# EAGLE board PCB (EAGLE 9.7.0)
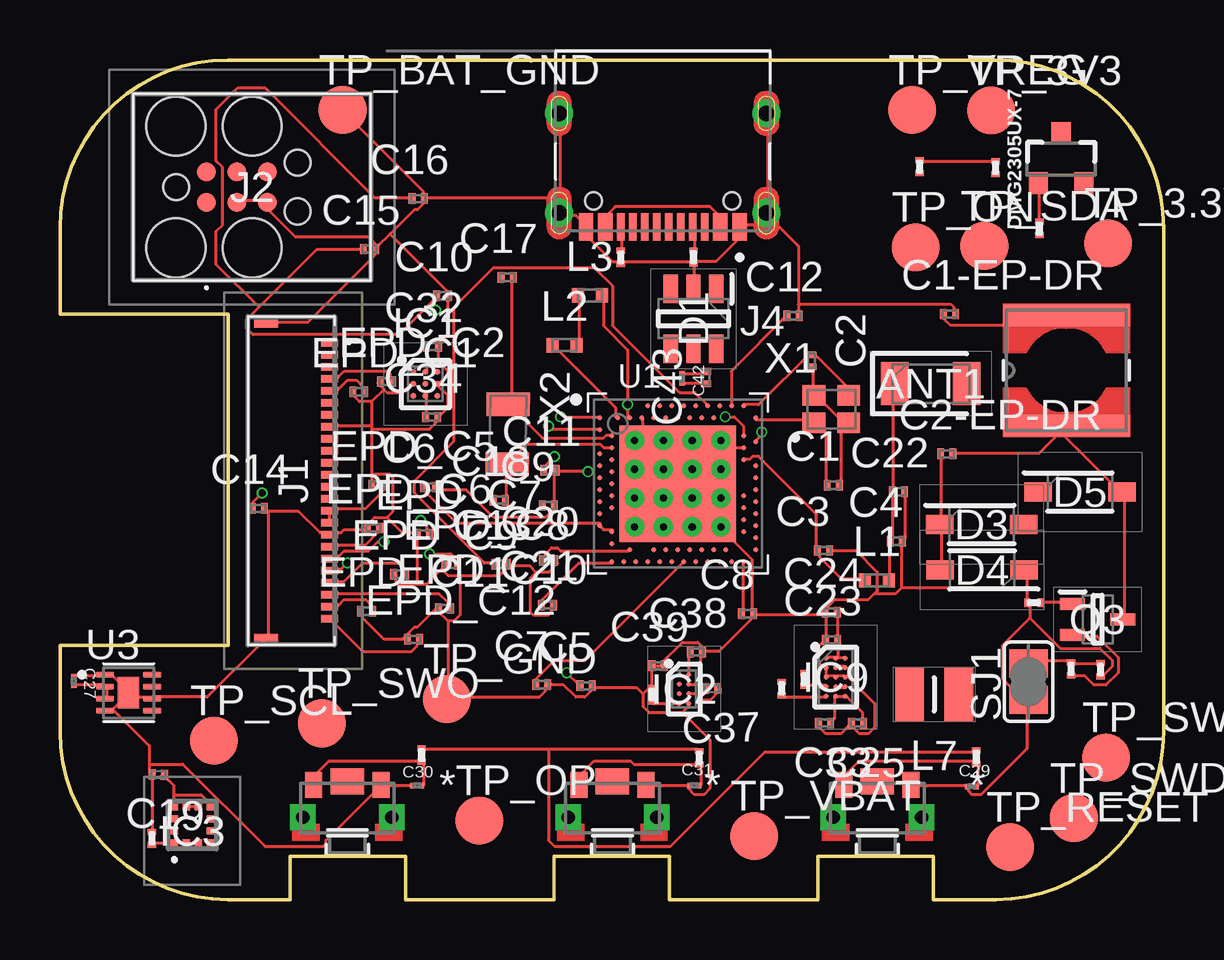
[diagram p0: board, top side]
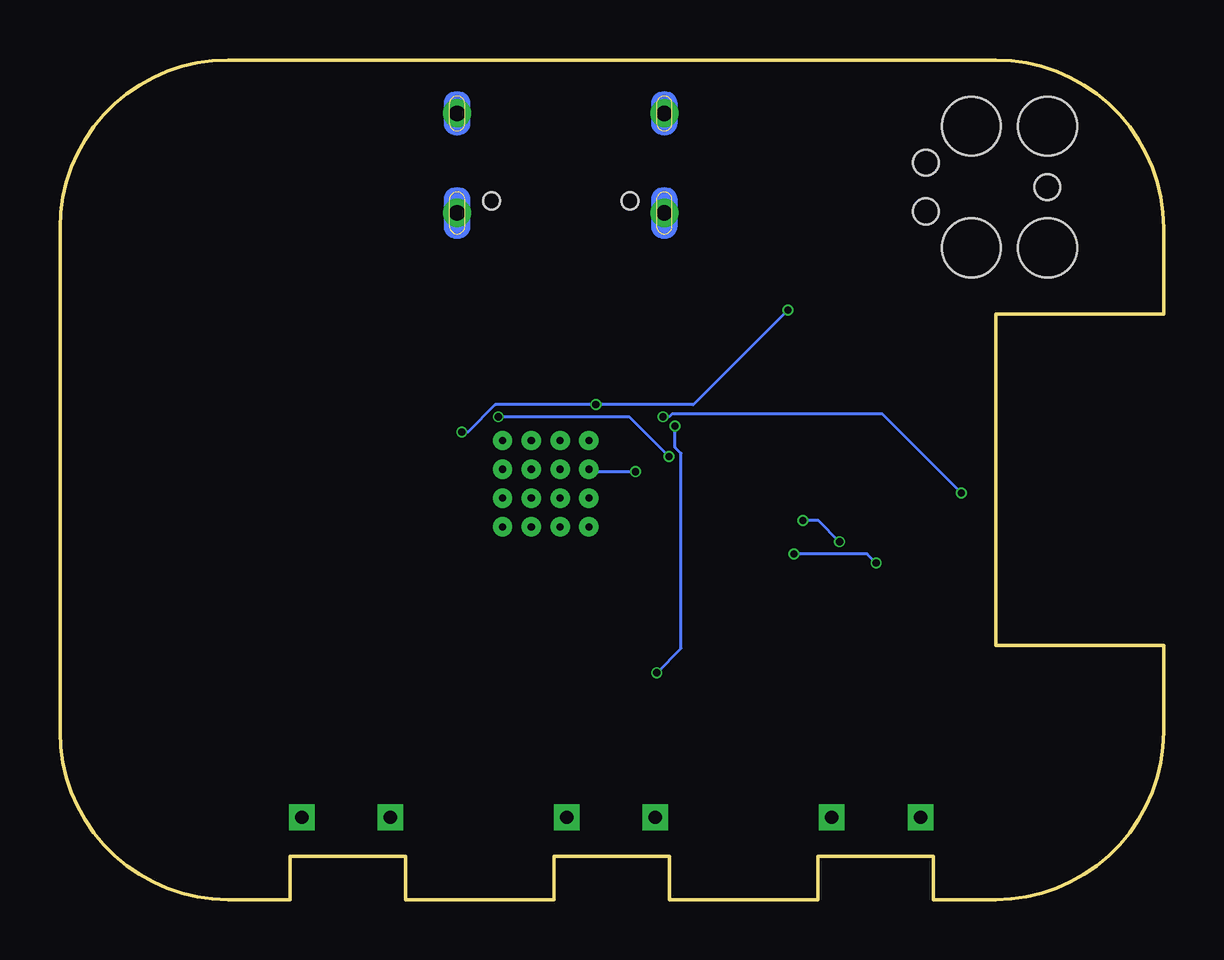
[diagram p1: board, bottom side, seen from below]

Size 46 x 35 mm. Coordinates in mm from the lower left corner, seen from the top.
Outline: 39,0 36.4,0 36.4,1.8 31.6,1.8 31.6,0 25.4,0 25.4,1.8 20.6,1.8 20.6,0 14.4,0 14.4,1.8 9.6,1.8 9.6,0 7,0 arc-90 0,7 0,10.6 7,10.6 7,24.4 0,24.4 0,28 arc-90 7,35 39,35 arc-90 46,28 46,7 arc-90 39,0
Copper layers (1*16): Top 0.035mm / dielectric 1.6mm / Bottom 0.035mm
Design rules "jlcpcb-2layers.dru": minimum track width 5mil, minimum drill 0.3mm, track to track 5mil, track to pad 5mil, pad to pad 5mil, via to via 5mil, smd to smd 5mil, copper to edge 0.2mm, drill to drill 6mil, minimum pad ring 10mil, minimum via ring 3mil, stop-mask expansion 4mil, vias tented up to drill 0mil, thermal gap 10mil

## Footprints (pad centres in the part's own frame; a part is rotated, then mirrored left to right if it is on the bottom)
2450AT18B100E_ANTC3216X140N = smd 1.15 x 1.8: 1 -1.5,0; 2 1.5,0
NORDIC_NRF_3_RESC0201_L = smd 0.28 x 0.43: 1 -0.255,0; 2 0.255,0
GRM011R60J152KE01L_2_CAPC0201X13N = smd 0.22 x 0.23: 1 -0.185,0; 2 0.185,0
ESP32_C6_LIBRARY_3_SOT95P280X145-6N = smd 1.2 x 0.6: 1 -1.25,0.95; 2 -1.25,0; 3 -1.25,-0.95; 4 1.25,-0.95; 5 1.25,0; 6 1.25,0.95
ESP32_C6_LIBRARY_5_SOD3716X135N = smd 1.15 x 0.8: 1 -1.75,0; 2 1.75,0
ESP32_C6_LIBRARY_4_ESP32_C6_LIBRARY_4_ESP32_C6_LIBRARY_4_ESP32_C6_LIBRARY_4_ESP32_WROVER_SPARKFUN-DISCRETESEMI_SOT23-3 = smd 0.8 x 0.9: 1 -0.95,-1; 2 0.95,-1; 3 0,1.1
DRV2605YZFR_BGA9C50P3X3_144X144X62 = smd 0.25 x 0.25: A1 -0.5,0.5; A2 0,0.5; A3 0.5,0.5; B1 -0.5,0; B2 0,0; B3 0.5,0; C1 -0.5,-0.5; C2 0,-0.5; C3 0.5,-0.5
BQ25180YBGR_BGA8C40P2X4_100X155X50 = smd 0.2 x 0.2: A1 -0.2,0.6; A2 0.2,0.6; B1 -0.2,0.2; B2 0.2,0.2; C1 -0.2,-0.2; C2 0.2,-0.2; D1 -0.2,-0.6; D2 0.2,-0.6
BMA423_BMA423 = smd 0.3 x 0.35: 1 -0.75,-0.775; 2 -0.25,-0.775; 3 0.25,-0.775; 4 0.75,-0.775; 7 0.75,0.775; 8 0.25,0.775; 9 -0.25,0.775; 10 -0.75,0.775 | smd 0.35 x 0.3: 5 0.775,-0.25; 6 0.775,0.25; 11 -0.775,0.25; 12 -0.775,-0.25
RT6160AWSC_BGA15C40P3X5_140X230X60 = smd 0.216 x 0.216: A1 -0.4,0.8; A2 0,0.8; A3 0.4,0.8; B1 -0.4,0.4; B2 0,0.4; B3 0.4,0.4; C1 -0.4,0; C2 0,0; C3 0.4,0; D1 -0.4,-0.4; D2 0,-0.4; D3 0.4,-0.4; E1 -0.4,-0.8; E2 0,-0.8; E3 0.4,-0.8
503480-2400_5034802400 = smd 0.3 x 0.7: 1 -5.75,1.525; 2 -5.25,1.525; 3 -4.75,1.525; 4 -4.25,1.525; 5 -3.75,1.525; 6 -3.25,1.525; 7 -2.75,1.525; 8 -2.25,1.525; 9 -1.75,1.525; 10 -1.25,1.525; 11 -0.75,1.525; 12 -0.25,1.525; 13 0.25,1.525; 14 0.75,1.525; 15 1.25,1.525; 16 1.75,1.525; 17 2.25,1.525; 18 2.75,1.525; 19 3.25,1.525; 20 3.75,1.525; 21 4.25,1.525; 22 4.75,1.525; 23 5.25,1.525; 24 5.75,1.525 | smd 0.3 x 1: MP1 -6.54,-1.125; MP2 6.54,-1.125
TC2030-IDC_TC2030IDC = smd 0.783 x 0.783: 1 -0.953,-0.635; 2 -0.953,0.635; 3 0.317,-0.635; 4 0.317,0.635; 5 1.588,-0.635; 6 1.588,0.635 | hole 2.451: -2.223,-2.54; -2.223,2.54; 0.952,-2.54; 0.952,2.54 | hole 1.067: -2.223,0; 2.857,-1.016; 2.857,1.016
KH-TYPE-C-16P_KINGHELM_KH-TYPE-C-16P = smd 0.6 x 1.15: A1_B12 -3.2,4.725; A4_B9 -2.4,4.725; A9_B4 2.4,4.725; A12_B1 3.2,4.725 | smd 0.3 x 1.15: A5 -1.25,4.725; A6 -0.25,4.725; A7 0.25,4.725; A8 1.25,4.725; B5 1.75,4.725; B6 0.75,4.725; B7 -0.75,4.725; B8 -1.75,4.725 | drill 0.65 pad 1.05: SH1 -4.32,0; SH2 4.32,0; SH3 -4.32,4.15; SH4 4.32,4.15 | hole 0.7: -2.89,3.65; 2.89,3.65
NORDIC_NRF_2_RESC0402_L = smd 0.5 x 0.6: 1 -0.5,0; 2 0.5,0
ESP32_C6_LIBRARY_2_IND_4828-WE-TPC_WRE = smd 0.9 x 5.3: 1 -2.286,0; 2 2.286,0
MLP2016SR47MT0S1_INDC2016X100N = smd 1.2 x 2.2: 1 -1.028,0; 2 1.028,0
ESP32_C6_LIBRARY_6_SOT65P210X110-3N = smd 1.05 x 0.5: 1 -1.05,0.65; 2 -1.05,-0.65; 3 1.05,0
ERA-1AEB3401C_0201 = smd 0.35 x 0.25: 1 0,0.275; 2 0,-0.275
ESP32_C6_LIBRARY_7_JUMPER_SJ = smd 1.168 x 1.6: 1 -0.762,0; 2 0.762,0
2025-10-22_07-23-44_LIBRARY_SW_EVP-AKE31A_PAN = smd 0.711 x 1.092: 1 -1.4,-0.972; 2 1.4,-0.972 | drill 0.559 pad 0.914 square: 3 -1.848,0.381; 4 1.848,0.381 | smd 1.397 x 1.092: 5 0,-1.124
HECTOR_WATCH_1_TP20R = smd 2 x 2: TP 0,0
NORDIC_NRF_4_AQFN50P700X700X85_HS-74N = smd 4.85 x 4.85: P$74 0,0 | drill 0.3 pad 0.6: P$75 -1.8,1.8; P$76 -0.6,1.8; P$77 0.6,1.8; P$78 1.8,1.8; P$79 -1.8,0.6; P$80 -0.6,0.6; P$81 0.6,0.6; P$82 1.8,0.6; P$83 -1.8,-0.6; P$84 -0.6,-0.6; P$85 0.6,-0.6; P$86 1.8,-0.6; P$87 -1.8,-1.8; P$88 -0.6,-1.8; P$89 0.6,-1.8; P$90 1.8,-1.8 | smd 0.2 x 0.2: P$A8 -1.25,3.25; P$A10 -0.75,3.25; P$A12 -0.25,3.25; P$A14 0.25,3.25; P$A16 0.75,3.25; P$A18 1.25,3.25; P$A20 1.75,3.25; P$A22 2.25,3.25; P$A23 2.75,3.25; P$AA24 3.25,-2.25; P$AB2 -2.75,-2.5; P$AC5 -2,-2.75; P$AC9 -1,-2.75; P$AC11 -0.5,-2.75; P$AC13 0,-2.75; P$AC15 0.5,-2.75; P$AC17 1,-2.75; P$AC19 1.5,-2.75; P$AC21 2,-2.75; P$AC24 3.25,-2.75; P$AD2 -2.75,-3.25; P$AD4 -2.25,-3.25; P$AD6 -1.75,-3.25; P$AD8 -1.25,-3.25; P$AD10 -0.75,-3.25; P$AD12 -0.25,-3.25; P$AD14 0.25,-3.25; P$AD16 0.75,-3.25; P$AD18 1.25,-3.25; P$AD20 1.75,-3.25; P$AD22 2.25,-3.25; P$AD23 2.75,-3.25; P$B1 -3.25,2.75; P$B3 -2.5,2.75; P$B5 -2,2.75; P$B7 -1.5,2.75; P$B9 -1,2.75; P$B11 -0.5,2.75; P$B13 0,2.75; P$B15 0.5,2.75; P$B17 1,2.75; P$B19 1.5,2.75; P$B24 3.25,2.75; P$C1 -3.25,2.25; P$D2 -2.75,2; P$D23 2.75,2; P$E24 3.25,1.75; P$F2 -2.75,1.5; P$F23 2.75,1.5; P$G1 -3.25,1.25; P$H2 -2.75,1; P$H23 2.75,1; P$J1 -3.25,0.75; P$J24 3.25,0.75; P$K2 -2.75,0.5; P$L1 -3.25,0.25; P$L24 3.25,0.25; P$M2 -2.75,0; P$N1 -3.25,-0.25; P$N24 3.25,-0.25; P$P2 -2.75,-0.5; P$P23 2.75,-0.5; P$R1 -3.25,-0.75; P$R24 3.25,-0.75; P$T2 -2.75,-1; P$T23 2.75,-1; P$U1 -3.25,-1.25; P$U24 3.25,-1.25; P$V23 2.75,-1.5; P$W1 -3.25,-1.75; P$W24 3.25,-1.75; P$Y2 -2.75,-2; P$Y23 2.75,-2
ESP32_C6_LIBRARY_SON50P200X200X80-9N = smd 0.76 x 0.27: 1 -0.985,0.75; 2 -0.985,0.25; 3 -0.985,-0.25; 4 -0.985,-0.75; 5 0.985,-0.75; 6 0.985,-0.25; 7 0.985,0.25; 8 0.985,0.75 | smd 0.9 x 1.3: 9 0,0
NORDIC_NRF_BT-XTAL_2016_N = smd 0.95 x 0.85: 1 -0.725,-0.575; 2 0.725,-0.575; 3 0.725,0.575; 4 -0.725,0.575
NORDIC_NRF_1_XTAL_3215_N = smd 1 x 1.8: 1 -1.25,0; 2 1.25,0

## Placement (x,y rotation side)
ANT1  2450AT18B100E_2450AT18B100E  [2450AT18B100E_ANTC3216X140N]  36.3,21.51 0 top
C1  12pF  [NORDIC_NRF_3_RESC0201_L]  32.23,17.27 0 top
C1-EP-DR  10µF  [NORDIC_NRF_3_RESC0201_L]  37.08,24.41 0 top
C2  12pF  [NORDIC_NRF_3_RESC0201_L]  31.32,22.46 270 top
C2-EP-DR  4.7µF/25V  [NORDIC_NRF_3_RESC0201_L]  36.96,18.58 0 top
C3  1pF  [NORDIC_NRF_3_RESC0201_L]  31.83,14.55 0 top
C4  1pF  [NORDIC_NRF_3_RESC0201_L]  34.86,14.94 0 top
C5  100nF  [NORDIC_NRF_3_RESC0201_L]  21.93,8.91 0 top
C6  4.7µF  [NORDIC_NRF_3_RESC0201_L]  15.4,17.2 0 top
C7  100nF  [NORDIC_NRF_3_RESC0201_L]  20.08,8.96 0 top
C8  100nF  [NORDIC_NRF_3_RESC0201_L]  28.67,11.92 0 top
C9  820pF  [NORDIC_NRF_3_RESC0201_L]  20.35,16.43 0 top
C10  N.C.  [NORDIC_NRF_3_RESC0201_L]  15.95,25.17 0 top
C11  100pF  [NORDIC_NRF_3_RESC0201_L]  20.43,17.89 0 top
C12  100nF  [NORDIC_NRF_3_RESC0201_L]  30.56,24.33 0 top
C13  N.C.  [NORDIC_NRF_3_RESC0201_L]  18.38,13.98 0 top
C14  4.7µF  [NORDIC_NRF_3_RESC0201_L]  8.27,16.31 0 top
C15  N.C.  [NORDIC_NRF_3_RESC0201_L]  12.91,27.12 0 top
C16  27nF  [NORDIC_NRF_3_RESC0201_L]  14.94,29.22 0 top
C17  12pF  [NORDIC_NRF_3_RESC0201_L]  18.64,25.94 0 top
C18  12pF  [NORDIC_NRF_3_RESC0201_L]  18.31,16.65 0 top
C19  100nF  [NORDIC_NRF_3_RESC0201_L]  4.1,5.21 177.5 top
C20  4.7µF  [NORDIC_NRF_3_RESC0201_L]  20.37,14.13 0 top
C21  4.7µF  [NORDIC_NRF_3_RESC0201_L]  20.32,12.28 0 top
C22  N.C.  [NORDIC_NRF_3_RESC0201_L]  34.95,17 0 top
C23  0.1uF  [NORDIC_NRF_3_RESC0201_L]  32.16,10.82 0 top
C24  10uF  [NORDIC_NRF_3_RESC0201_L]  32.15,11.98 0 top
C25  22uF  [NORDIC_NRF_3_RESC0201_L]  33.25,7.36 180 top
C27  GRM011R60J152KE01L_2_GRM011R60J152KE01L  [GRM011R60J152KE01L_2_CAPC0201X13N]  0.58,9.11 270.7 top
C29  GRM011R60J152KE01L_2_GRM011R60J152KE01L  [GRM011R60J152KE01L_2_CAPC0201X13N]  38.01,4.72 0 top
C30  GRM011R60J152KE01L_2_GRM011R60J152KE01L  [GRM011R60J152KE01L_2_CAPC0201X13N]  14.89,4.76 0 top
C31  GRM011R60J152KE01L_2_GRM011R60J152KE01L  [GRM011R60J152KE01L_2_CAPC0201X13N]  26.44,4.76 0 top
C32  1µF  [NORDIC_NRF_3_RESC0201_L]  15.53,23.05 0 top
C33  22uF  [NORDIC_NRF_3_RESC0201_L]  31.87,7.36 180 top
C34  0.1µF  [NORDIC_NRF_3_RESC0201_L]  15.5,20.11 0 top
C37  [NORDIC_NRF_3_RESC0201_L]  27.16,8.8 181.9 top
C38  [NORDIC_NRF_3_RESC0201_L]  26.53,10.32 0 top
C39  [NORDIC_NRF_3_RESC0201_L]  24.93,9.74 0 top
C42  GRM011R60J152KE01L_2_GRM011R60J152KE01L  [GRM011R60J152KE01L_2_CAPC0201X13N]  25.93,21.73 270 top
C43  4.7uF  [NORDIC_NRF_3_RESC0201_L]  26.93,21.75 90 top
D1  ESP32_C6_LIBRARY_3_USBLC6-2SC6Y  [ESP32_C6_LIBRARY_3_SOT95P280X145-6N]  26.41,24.21 270 top
D3  ESP32_C6_LIBRARY_5_MBR0530  [ESP32_C6_LIBRARY_5_SOD3716X135N]  38.42,15.64 0 top
D4  ESP32_C6_LIBRARY_5_MBR0530  [ESP32_C6_LIBRARY_5_SOD3716X135N]  38.44,13.74 180 top
D5  ESP32_C6_LIBRARY_5_MBR0530  [ESP32_C6_LIBRARY_5_SOD3716X135N]  42.52,16.99 0 top
DMG2305UX-7  20V/4.2A/52mΩ/1.4W  [ESP32_C6_LIBRARY_4_ESP32_C6_LIBRARY_4_ESP32_C6_LIBRARY_4_ESP32_C6_LIBRARY_4_ESP32_WROVER_SPARKFUN-DISCRETESEMI_SOT23-3]  41.73,30.86 0 top
EPD_C1  1uF/50V  [NORDIC_NRF_3_RESC0201_L]  12.46,21.17 0 top
EPD_C2  1uF/50V  [NORDIC_NRF_3_RESC0201_L]  13.62,21.59 0 top
EPD_C5  0.1uF/50V  [NORDIC_NRF_3_RESC0201_L]  13.25,17.28 0 top
EPD_C6  0.1uF/50V  [NORDIC_NRF_3_RESC0201_L]  13.07,15.49 0 top
EPD_C7  0.1uF/50V  [NORDIC_NRF_3_RESC0201_L]  15.15,15.23 0 top
EPD_C8  0.1uF/50V  [NORDIC_NRF_3_RESC0201_L]  16.3,13.98 0 top
EPD_C9  0.1uF/50V  [NORDIC_NRF_3_RESC0201_L]  14.16,13.57 0 top
EPD_C10  0.1uF/50V  [NORDIC_NRF_3_RESC0201_L]  16.04,12.14 0 top
EPD_C11  0.1uF/50V  [NORDIC_NRF_3_RESC0201_L]  12.77,12.02 0 top
EPD_C12  0.1uF/50V  [NORDIC_NRF_3_RESC0201_L]  14.73,10.85 0 top
IC1  DRV2605YZFR_DRV2605YZFR  [DRV2605YZFR_BGA9C50P3X3_144X144X62]  15.24,21.49 0 top
IC2  BQ25180YBGR_BQ25180YBGR  [BQ25180YBGR_BGA8C40P2X4_100X155X50]  26.02,8.78 0 top
IC3  BMA423_BMA423  [BMA423_BMA423]  5.52,3.11 0 top
IC9  RT6160AWSC_RT6160AWSC  [RT6160AWSC_BGA15C40P3X5_140X230X60]  32.33,9.27 0 top
J1  503480-2400_503480-2400  [503480-2400_5034802400]  9.72,17.46 270 top
J2  TC2030-IDC_TC2030-IDC  [TC2030-IDC_TC2030IDC]  7.06,29.7 0 top
J4  KH-TYPE-C-16P_KH-TYPE-C-16P  [KH-TYPE-C-16P_KINGHELM_KH-TYPE-C-16P]  25.13,32.77 180 top
L1  3.9nH  [NORDIC_NRF_2_RESC0402_L]  34.05,13.3 0 top
L2  10µH  [NORDIC_NRF_2_RESC0402_L]  21.04,23.11 0 top
L3  15nH  [NORDIC_NRF_2_RESC0402_L]  22.08,25.18 0 top
L5  68uH  [ESP32_C6_LIBRARY_2_IND_4828-WE-TPC_WRE]  41.95,22.06 90 top
L7  MLP2016SR47MT0S1_FTC252012SR47MBCA  [MLP2016SR47MT0S1_INDC2016X100N]  36.44,8.56 0 top
Q3  ESP32_C6_LIBRARY_6_SI1308EDL-T1-GE3  [ESP32_C6_LIBRARY_6_SOT65P210X110-3N]  43.25,11.68 0 top
R1_EP_DR  ERA-1AEB3401C_CPF0201D7K68C1  [ERA-1AEB3401C_0201]  42.14,9.62 0 top
R1_USB  ERA-1AEB3401C_CPF0201D7K68C1  [ERA-1AEB3401C_0201]  26.41,26.78 0 top
R2  ERA-1AEB3401C_CPF0201D7K68C1  [ERA-1AEB3401C_0201]  30.08,8.79 0 top
R2_EP_DR  ERA-1AEB3401C_CPF0201D7K68C1  [ERA-1AEB3401C_0201]  40.59,12.37 90 top
R2_USB  ERA-1AEB3401C_CPF0201D7K68C1  [ERA-1AEB3401C_0201]  23.38,26.77 0 top
R3  ERA-1AEB3401C_CPF0201D7K68C1  [ERA-1AEB3401C_0201]  3.84,2.55 0 top
R4  ERA-1AEB3401C_CPF0201D7K68C1  [ERA-1AEB3401C_0201]  31.03,9.17 0 top
R5  ERA-1AEB3401C_CPF0201D7K68C1  [ERA-1AEB3401C_0201]  15.07,6.02 180 top
R7  ERA-1AEB3401C_CPF0201D7K68C1  [ERA-1AEB3401C_0201]  38.19,5.94 180 top
R8  ERA-1AEB3401C_CPF0201D7K68C1  [ERA-1AEB3401C_0201]  26.64,5.91 179.6 top
R9  ERA-1AEB3401C_CPF0201D7K68C1  [ERA-1AEB3401C_0201]  24.67,8.54 0 top
R17  ERA-1AEB3401C_CPF0201D7K68C1  [ERA-1AEB3401C_0201]  39,30.51 0 top
R18  ERA-1AEB3401C_CPF0201D7K68C1  [ERA-1AEB3401C_0201]  35.84,30.55 0 top
R_PWR_EPD  ERA-1AEB3401C_CPF0201D7K68C1  [ERA-1AEB3401C_0201]  40.83,27.98 0 top
R_TYPE_SEL  ERA-1AEB3401C_CPF0201D7K68C1  [ERA-1AEB3401C_0201]  43.38,9.58 180 top
SJ1  [ESP32_C6_LIBRARY_7_JUMPER_SJ]  40.37,9.08 90 top
SW_DN  2025-10-22_07-23-44_LIBRARY_EVP-AKE31ASW_EVP-AKE31A_PAN  [2025-10-22_07-23-44_LIBRARY_SW_EVP-AKE31A_PAN]  34.07,3.81 180 top
SW_ENT  2025-10-22_07-23-44_LIBRARY_EVP-AKE31ASW_EVP-AKE31A_PAN  [2025-10-22_07-23-44_LIBRARY_SW_EVP-AKE31A_PAN]  23.03,3.81 180 top
SW_UP  2025-10-22_07-23-44_LIBRARY_EVP-AKE31ASW_EVP-AKE31A_PAN  [2025-10-22_07-23-44_LIBRARY_SW_EVP-AKE31A_PAN]  11.98,3.81 180 top
TP_3.3V  HECTOR_WATCH_1_TPTP20R  [HECTOR_WATCH_1_TP20R]  43.69,27.36 0 top
TP_3V3  HECTOR_WATCH_1_TPTP20R  [HECTOR_WATCH_1_TP20R]  38.82,32.89 0 top
TP_BAT_GND  HECTOR_WATCH_1_TPTP20R  [HECTOR_WATCH_1_TP20R]  11.78,32.91 0 top
TP_GND  HECTOR_WATCH_1_TPTP20R  [HECTOR_WATCH_1_TP20R]  16.13,8.35 0 top
TP_ON  HECTOR_WATCH_1_TPTP20R  [HECTOR_WATCH_1_TP20R]  35.66,27.19 0 top
TP_OP  HECTOR_WATCH_1_TPTP20R  [HECTOR_WATCH_1_TP20R]  17.49,3.29 0 top
TP_RESET  HECTOR_WATCH_1_TPTP20R  [HECTOR_WATCH_1_TP20R]  39.61,2.18 0 top
TP_SCL  HECTOR_WATCH_1_TPTP20R  [HECTOR_WATCH_1_TP20R]  6.42,6.63 0 top
TP_SDA  HECTOR_WATCH_1_TPTP20R  [HECTOR_WATCH_1_TP20R]  38.53,27.24 0 top
TP_SWDCLK  HECTOR_WATCH_1_TPTP20R  [HECTOR_WATCH_1_TP20R]  43.6,5.92 0 top
TP_SWDIO  HECTOR_WATCH_1_TPTP20R  [HECTOR_WATCH_1_TP20R]  42.26,3.39 0 top
TP_SWO  HECTOR_WATCH_1_TPTP20R  [HECTOR_WATCH_1_TP20R]  10.91,7.34 0 top
TP_VBAT  HECTOR_WATCH_1_TPTP20R  [HECTOR_WATCH_1_TP20R]  28.94,2.65 0 top
TP_VREG  HECTOR_WATCH_1_TPTP20R  [HECTOR_WATCH_1_TP20R]  35.53,32.91 0 top
U1  NORDIC_NRF_4_NRF52840_QF  [NORDIC_NRF_4_AQFN50P700X700X85_HS-74N]  25.75,17.34 0 top
U3  ESP32_C6_LIBRARY_MAX17048G+T10  [ESP32_C6_LIBRARY_SON50P200X200X80-9N]  2.86,8.62 0 top
X1  [NORDIC_NRF_BT-XTAL_2016_N]  32.15,20.44 0 top
X2  32.768kHz  [NORDIC_NRF_1_XTAL_3215_N]  18.66,19.4 269 top

## Library data of the parts
ANT1 = InkTime_v5; ARROW_PART_NUMBER: 2450AT18B100E; ARROW_PRICE-STOCK: https://www.arrow.com/en/products/2450at18b100e/johanson-dielectrics?utm_currency=USD&region=nac; DESCRIPTION: Antennas 2.45GHz ANTENNA; HEIGHT: 1.4mm; MANUFACTURER_NAME: JOHANSON TECHNOLOGY; MANUFACTURER_PART_NUMBER: 2450AT18B100E; MOUSER_PART_NUMBER: 609-2450AT18B100E; MOUSER_PRICE-STOCK: https://www.mouser.co.uk/ProductDetail/Johanson-Technology/2450AT18B100E?qs=yCnrNFeXz%252Bh5MFsFIXGZGA%3D%3D
C1 C1-EP-DR C2 C2-EP-DR C3-C25 C32-C34 C37-C39 C43 EPD_C1 EPD_C2 EPD_C5-EPD_C12 L1-L3 R1_EP_DR R1_USB R2 R2_EP_DR R2_USB R3-R5 R7-R9 R17 R18 R_PWR_EPD R_TYPE_SEL SJ1 TP_3.3V TP_3V3 TP_BAT_GND TP_GND TP_ON TP_OP TP_RESET TP_SCL TP_SDA TP_SWDCLK TP_SWDIO TP_SWO TP_VBAT TP_VREG U1 X1 X2 = InkTime_v5
C27 C29-C31 C42 = InkTime_v5; AVAILABILITY: In Stock; CHECK_PRICES: https://www.snapeda.com/parts/GRM011R60J152KE01L/Murata/view-part/?ref=eda; DESCRIPTION: SMD Capacitor X5R(EIA) with Capacitance: 1500pF Tol. 10%. Rated Voltage: 6.3Vdc; MF: Murata; MP: GRM011R60J152KE01L; PACKAGE: 0201 Murata; PRICE: None; SNAPEDA_LINK: https://www.snapeda.com/parts/GRM011R60J152KE01L/Murata/view-part/?ref=snap
D1 = InkTime_v5; AVAILABILITY: In Stock; CHECK_PRICES: https://www.snapeda.com/parts/USBLC6-2SC6Y/STMicroelectronics/view-part/?ref=eda; DESCRIPTION: 17V Clamp 5A (8/20µs) Ipp Tvs Diode Surface Mount SOT-23-6; MF: STMicroelectronics; MP: USBLC6-2SC6Y; PACKAGE: SOT-23-6 STMicroelectronics; PRICE: None; SNAPEDA_LINK: https://www.snapeda.com/parts/USBLC6-2SC6Y/STMicroelectronics/view-part/?ref=snap
D3-D5 = InkTime_v5; AVAILABILITY: In Stock; CHECK_PRICES: https://www.snapeda.com/parts/MBR0530/Onsemi/view-part/?ref=eda; DESCRIPTION: Diode Schottky 30 V 500mA Surface Mount SOD-123; MF: ON Semiconductor; MP: MBR0530; PACKAGE: SOD-123-2 ON Semiconductor; PRICE: None; PURCHASE-URL: https://www.snapeda.com/api/url_track_click_mouser/?unipart_id=179458&manufacturer=ON Semiconductor&part_name=MBR0530&search_term=None; SNAPEDA_LINK: https://www.snapeda.com/parts/MBR0530/Onsemi/view-part/?ref=snap
DMG2305UX-7 = InkTime_v5; PROD_ID: TRAN-14388
IC1 = InkTime_v5; ARROW_PART_NUMBER: DRV2605YZFR; ARROW_PRICE-STOCK: https://www.arrow.com/en/products/drv2605yzfr/texas-instruments?region=nac; DESCRIPTION: Haptic Driver for ERM/LRA with Built-In Library and Smart Loop Architecture; HEIGHT: 0.625mm; MANUFACTURER_NAME: Texas Instruments; MANUFACTURER_PART_NUMBER: DRV2605YZFR
IC2 = InkTime_v5; ARROW_PART_NUMBER: BQ25180YBGR; ARROW_PRICE-STOCK: https://www.arrow.com/en/products/bq25180ybgr/texas-instruments?utm_currency=USD&region=nac; DESCRIPTION: Charger IC Lithium Ion/Polymer, Lithium Iron Phosphate 8-DSBGA (1.6x1.1); HEIGHT: 0.5mm; MANUFACTURER_NAME: Texas Instruments; MANUFACTURER_PART_NUMBER: BQ25180YBGR; MOUSER_PART_NUMBER: 595-BQ25180YBGR; MOUSER_PRICE-STOCK: https://www.mouser.co.uk/ProductDetail/Texas-Instruments/BQ25180YBGR?qs=doiCPypUmgEWjAK%252BJAX6Tw%3D%3D
IC3 = InkTime_v5; ARROW_PART_NUMBER: BMA423; ARROW_PRICE-STOCK: https://www.arrow.com/en/products/bma423/bosch; DESCRIPTION: Accelerometers Triaxial low-g 12bit Acceleration Sensor; HEIGHT: 1mm; MANUFACTURER_NAME: BOSCH; MANUFACTURER_PART_NUMBER: BMA423; MOUSER_PART_NUMBER: 262-BMA423; MOUSER_PRICE-STOCK: https://www.mouser.co.uk/ProductDetail/Bosch-Sensortec/BMA423?qs=HXFqYaX1Q2xC%252BSgeGoX3mg%3D%3D
IC9 = InkTime_v5; DESCRIPTION: Buck-Boost Regulator Positive Output Step-Up/Step-Down I2C DC-DC Controller IC 15-WL-CSP (BSC) (1.4x2.3); HEIGHT: 0.6mm; MANUFACTURER_NAME: RICHTEK; MANUFACTURER_PART_NUMBER: RT6160AWSC; MOUSER_PART_NUMBER: 835-RT6160AWSC; MOUSER_PRICE-STOCK: https://www.mouser.co.uk/ProductDetail/Richtek/RT6160AWSC?qs=amGC7iS6iy%2FLd9PSoixZXQ%3D%3D
J1 = InkTime_v5; DESCRIPTION: FFC & FPC Connectors 0.5mm FPC RA SMT Dual Contact 24Ckt; HEIGHT: 1.87mm; MANUFACTURER_NAME: Molex; MANUFACTURER_PART_NUMBER: 503480-2400; MOUSER_PART_NUMBER: 538-503480-2400; MOUSER_PRICE-STOCK: https://www.mouser.co.uk/ProductDetail/Molex/503480-2400?qs=OAhjpuo3Vu7efIoxFh9AOw%3D%3D
J2 = InkTime_v5; DESCRIPTION: CABLE ADAPTER 6 POS; HEIGHT: 19mm; MANUFACTURER_NAME: Tag Connect; MANUFACTURER_PART_NUMBER: TC2030-IDC
J4 = InkTime_v5; AVAILABILITY: Not in stock; CHECK_PRICES: https://www.snapeda.com/parts/KH-TYPE-C-16P/Kinghelm/view-part/?ref=eda; MF: kinghelm; MP: KH-TYPE-C-16P; PACKAGE: None; PRICE: None; SNAPEDA_LINK: https://www.snapeda.com/parts/KH-TYPE-C-16P/Kinghelm/view-part/?ref=snap
L5 = InkTime_v5; COPYRIGHT: Copyright (C) 2024 Ultra Librarian. All rights reserved.; MANUFACTURER_PART_NUMBER: 744043680; MFR_NAME: Wurth Electronics
L7 = InkTime_v5; DESCRIPTION: SMD / SMT Inductors (Coils), L=0.47?H, L x W x T :; HEIGHT: 1mm; JLCPCB: https://jlcpcb.com/partdetail/6763488-FTC252012SR47MBCA/C5832368; MANUFACTURER_NAME: TDK; MANUFACTURER_PART_NUMBER: FTC252012SR47MBCA
Q3 = InkTime_v5; AVAILABILITY: In Stock; CHECK_PRICES: https://www.snapeda.com/parts/SI1308EDL-T1-GE3/Vishay+Siliconix/view-part/?ref=eda; DESCRIPTION: Si1308EDL-T1-GE3 N-channel MOSFET Transistor, 1.5 A, 30 V, 3-Pin SC-70 | Siliconix / Vishay SI1308EDL-T1-GE3; MF: Vishay Siliconix; MP: SI1308EDL-T1-GE3; PACKAGE: SOT-323 Vishay Semiconductor; PRICE: None; PURCHASE-URL: https://www.snapeda.com/api/url_track_click_mouser/?unipart_id=274603&manufacturer=Vishay Siliconix&part_name=SI1308EDL-T1-GE3&search_term=None; SNAPEDA_LINK: https://www.snapeda.com/parts/SI1308EDL-T1-GE3/Vishay+Siliconix/view-part/?ref=snap
SW_DN SW_ENT SW_UP = InkTime_v5; COPYRIGHT: Copyright (C) 2025 Ultra Librarian. All rights reserved.; DIGI-KEY_PART_NUMBER_1: P123437TR-ND; DIGI-KEY_PART_NUMBER_2: P123437CT-ND; DIGI-KEY_PART_NUMBER_3: P123437DKR-ND; MANUFACTURER_NAME: Panasonic; MANUFACTURER_PART_NUMBER: EVP-AKE31A
U3 = InkTime_v5; AVAILABILITY: In Stock; CHECK_PRICES: https://www.snapeda.com/parts/MAX17048G+T10/Analog+Devices/view-part/?ref=eda; DESCRIPTION: 3µA 1-Cell/2-Cell Fuel Gauge with ModelGauge; MF: Analog Devices; MP: MAX17048G+T10; PACKAGE: TDFN-8 Maxim; PRICE: None; PURCHASE-URL: https://www.snapeda.com/api/url_track_click_mouser/?unipart_id=329239&manufacturer=Analog Devices&part_name=MAX17048G+T10&search_term=None; SNAPEDA_LINK: https://www.snapeda.com/parts/MAX17048G+T10/Analog+Devices/view-part/?ref=snap

## Nets
GND: C1-EP-DR.2 C3.2 C4.2 C5.2 C6.2 C7.2 C8.2 C9.2 C10.2 C11.2 C12.2 C13.2 C14.2 C15.2 C16.2 C19.2 C20.2 C21.2 C22.2 C23.1 C24.1 C25.2 C27.1 C29.1 C30.1 C31.1 C32.2 C33.2 C34.2 C37.2 C38.2 C39.1 C39.2 D1.2 D4.1 EPD_C1.1 EPD_C2.1 EPD_C5.1 EPD_C6.1 EPD_C7.1 EPD_C8.1 EPD_C9.1 EPD_C10.1 EPD_C11.1 EPD_C12.1 IC1.B1 IC1.B3 IC2.B2 IC2.D2 IC9.B1 IC9.C1 IC9.C2 IC9.C3 J1.8 J1.17 J1.MP1 J1.MP2 J2.3 J2.5 J4.A1_B12 J4.A12_B1 J4.SH1 J4.SH2 J4.SH3 J4.SH4 R1_USB.2 R2_EP_DR.1 R2_USB.2 R3.1 R9.1 R_TYPE_SEL.1 SJ1.1 SW_DN.1 SW_ENT.1 SW_UP.1 TP_BAT_GND.TP TP_GND.TP U1.P$74 U1.P$75 U1.P$76 U1.P$77 U1.P$78 U1.P$79 U1.P$80 U1.P$81 U1.P$82 U1.P$83 U1.P$84 U1.P$85 U1.P$86 U1.P$87 U1.P$88 U1.P$89 U1.P$90 U1.P$B7 U1.P$F23 U3.1 U3.4 U3.6 U3.9
GND1: R1_EP_DR.1 R_TYPE_SEL.2 SJ1.2
GND2: C29.2 R7.1 SW_DN.2
GND3: C31.2 R8.1 SW_ENT.2
GND4: C30.2 R5.1 SW_UP.2
N$1: IC2.D1 R9.2
N$2: IC2.A1
N$3: C38.1 IC2.A2
N$4: IC2.B1
N$5: L7.1
N$6: L7.2
N$7: C37.1 IC2.C2
N$8: C23.2 C24.2 IC9.A1 IC9.A2 IC9.A3
N$9: TP_3V3.TP
N$10: IC9.B2 IC9.B3
N$13: TP_VREG.TP
N$14: IC9.D1 R4.2
N$15: R4.1
N$16: R17.1 R18.1
N$17: R17.2
N$18: R18.2
N$19: TP_SCL.TP
N$20: TP_SDA.TP
N$21: IC9.D2 IC9.D3
N$22: C25.1 C33.1 IC9.E2 IC9.E3
N$23: IC9.E1 R2.2
N$24: R2.1
N$25: C19.1 IC3.7 IC3.10
N$26: IC3.3
N$27: IC3.2
N$28: IC3.6
N$29: IC3.5
N$30: IC3.12
N$31: IC3.8 IC3.9
N$32: IC3.1 R3.2
N$33: TP_3.3V.TP
N$34: TP_RESET.TP
N$35: TP_SWDCLK.TP
N$36: TP_SWDIO.TP
N$37: TP_SWO.TP
N$38: J2.1
N$39: J2.2
N$40: J2.4
N$41: J2.6
N$42: C7.1 U1.P$AD14
N$43: C21.1 U1.P$AD2
N$44: U1.P$AD22
N$45: U1.P$AC21
N$46: U1.P$AD20
N$47: U1.P$AC19
N$48: U1.P$AD18
N$49: U1.P$AC17
N$50: U1.P$AD16
N$51: U1.P$AC15
N$52: U1.P$AC13
N$53: U1.P$AD12
N$54: U1.P$AC11
N$55: U1.P$AD10
N$56: U1.P$AC9
N$57: U1.P$AD8
N$58: U1.P$AD6
N$59: U1.P$AD4
N$60: C8.1 U1.P$AD23
N$61: U1.P$N24
N$62: C9.1
N$63: U1.P$AA24
N$64: U1.P$AC24
N$65: U1.P$Y23
N$66: U1.P$W24
N$67: U1.P$V23
N$68: U1.P$U24
N$69: U1.P$T23
N$70: U1.P$R24
N$71: U1.P$P23
N$72: U1.P$L24
N$73: U1.P$J24
N$74: C3.1 L1.1 U1.P$H23
N$75: ANT1.1 C4.1 C22.1 L1.2
N$76: C10.1 C15.1 C16.1 L3.2 U1.P$B5 U1.P$E24
N$77: C11.1 U1.P$D23
N$78: C1.1 U1.P$B24 X1.1
N$79: C2.1 U1.P$A23 X1.3
N$80: C1.2 C2.2 X1.2 X1.4
N$81: C12.1 U1.P$A22
N$82: U1.P$A20
N$83: U1.P$B19
N$84: U1.P$B17
N$85: U1.P$A16
N$86: U1.P$B15
N$87: U1.P$A14
N$88: U1.P$B13
N$89: U1.P$A12
N$90: U1.P$B11
N$91: U1.P$A10
N$92: U1.P$B9
N$93: U1.P$A8
N$94: C13.1 U1.P$A18
N$95: L2.2 L3.1
N$96: L2.1 U1.P$B3
N$97: C20.1 U1.P$AC5
N$98: C6.1 U1.P$W1 U1.P$Y2
N$99: U1.P$U1
N$100: U1.P$T2
N$101: U1.P$R1
N$102: U1.P$P2
N$103: U1.P$N1
N$104: U1.P$M2
N$105: U1.P$L1
N$106: U1.P$K2
N$107: U1.P$J1
N$108: U1.P$H2
N$109: U1.P$G1
N$110: C14.1 U1.P$B1
N$111: C5.1 U1.P$C1
N$112: C17.2 U1.P$D2 X2.1
N$113: C17.1
N$114: C18.2 U1.P$F2 X2.2
N$115: C18.1
N$116: DMG2305UX-7.3
N$117: DMG2305UX-7.2
N$118: C1-EP-DR.1 L5.2
N$119: C2-EP-DR.2 D5.2 L5.1 Q3.3
N$120: C2-EP-DR.1 D3.1 D4.2
N$121: D3.2
N$122: D5.1
N$123: Q3.1 R2_EP_DR.2
N$124: Q3.2 R1_EP_DR.2
N$125: DMG2305UX-7.1 R_PWR_EPD.1
N$126: R_PWR_EPD.2
N$127: TP_OP.TP
N$128: TP_ON.TP
N$129: IC1.A1
N$130: IC1.A3
N$131: IC1.B2
N$132: C32.1 IC1.A2
N$133: IC1.C3
N$134: C34.1 IC1.C2
N$135: IC1.C1
N$136: R5.2 R7.2 R8.2
N$137: TP_VBAT.TP
N$138: U3.5
N$139: U3.7
N$140: U3.8
N$141: C27.2 U3.2 U3.3
N$142: J1.2
N$143: J1.3
N$144: J1.9
N$145: J1.10
N$146: J1.11
N$147: J1.12
N$148: J1.13
N$149: J1.14
N$150: EPD_C12.2 J1.24
N$151: EPD_C2.2 J1.4
N$152: EPD_C1.2 J1.5
N$153: EPD_C5.2 J1.15 J1.16
N$154: EPD_C11.2 J1.23
N$155: EPD_C10.2 J1.22
N$156: EPD_C9.2 J1.21
N$157: EPD_C8.2 J1.20
N$158: EPD_C7.2 J1.19
N$159: EPD_C6.2 J1.18
N$160: J4.B6
N$161: J4.B7
N$162: J4.A4_B9 J4.A9_B4
N$163: J4.A6
N$164: J4.A7
N$165: J4.B5 R2_USB.1
N$166: J4.A5 R1_USB.1
N$167: D1.3
N$168: D1.1
N$169: D1.6
N$170: D1.5
N$171: D1.4
N$172: C42.2 C43.1
N$173: C42.1 C43.2
SDA/2.4C: IC2.C1

## Tracks (layer width: path | path; a pad name or v marks a point on that pad's centre or on a via)
GND  (via drill 0.3)
  Top 0.127: C6.2 15.66,17.07 16.93,17.07 18.08,15.93 20.23,15.93 20.62,16.31 C9.2 20.62,17.84 C11.2 20.74,17.84 v22.01,17.84 | 24.04,19.23 24.3,19.49 24.3,20 U1.P$B7 | 27.6,19.11 27.85,18.85 28.49,18.85 U1.P$F23 | 25.06,15.55 24.04,15.55 U1.P$87 | 25.06,15.55 U1.P$88 | 25.06,15.55 U1.P$74 | 24.04,17.84 24.04,16.82 U1.P$83 | U1.P$84 25.19,16.69 25.44,16.69 U1.P$74 | 24.04,17.84 U1.P$79 | 24.04,17.84 U1.P$74 | U1.P$80 25.19,17.96 U1.P$74 | 27.47,15.55 26.46,15.55 U1.P$89 | U1.P$85 26.33,16.82 U1.P$74 | 27.47,15.55 U1.P$90 27.6,15.42 28.87,14.15 28.87,11.99 C8.2 29,11.87 | 27.47,15.55 U1.P$74 | U1.P$86 27.47,16.69 26.97,16.19 26.84,16.19 U1.P$74 | U1.P$81 26.33,17.96 U1.P$74 | U1.P$82 27.47,17.96 26.97,18.47 U1.P$74 | 24.04,19.23 U1.P$75 | 24.04,19.23 U1.P$74 | U1.P$76 25.06,19.11 24.55,18.6 U1.P$74 | U1.P$77 26.46,19.11 26.97,18.6 27.09,18.6 U1.P$74 | 27.6,19.11 U1.P$78 | 27.6,19.11 U1.P$74 | SW_DN.1 35.47,4.76 37.76,4.76 C29.1 37.89,4.63 37.89,4.5 38.01,4.37 38.4,4.37 40.3,6.28 40.3,8.31 SJ1.1 40.3,8.44 40.05,8.44 39.28,9.2 39.28,10.6 40.43,11.74 | 40.3,13.01 40.3,13.65 D4.1 | 40.3,13.01 40.3,12.38 R2_EP_DR.1 40.43,12.25 40.43,11.74 | 40.43,11.74 41.7,10.47 43.35,10.47 43.86,9.96 43.86,9.71 43.48,9.33 R_TYPE_SEL.1 | 26.2,4.76 24.55,4.76 SW_ENT.1 | 22.27,8.82 21.89,8.44 21.5,8.44 21,8.95 20.36,8.95 C7.2 20.23,8.95 20.23,8.69 19.98,8.44 16.17,8.44 | 26.71,8.95 26.2,8.95 IC2.B2 | 26.71,8.95 26.84,8.82 C37.2 | 26.71,8.95 26.71,10.22 C38.2 | 24.68,9.71 25.06,9.71 C39.2 25.06,9.84 25.95,10.72 26.58,10.72 26.71,10.6 26.71,10.34 C38.2 | 25.95,7.8 26.2,8.06 26.2,8.18 IC2.D2 | 25.95,7.8 24.55,7.8 24.3,8.06 24.3,8.57
  Top 0.127: 24.3,8.57 24.55,8.82 R9.1 24.68,9.71 | 24.68,9.71 C39.1 | 22.27,8.82 24.04,8.82 24.3,8.57 | 22.27,8.82 C5.2 | 26.2,4.76 26.2,4.63 26.46,4.37 26.84,4.37 27.09,4.63 27.09,6.66 25.95,7.8 | 26.2,4.76 C31.1 | C22.2 35.22,16.95 35.22,15.04 C4.2 35.09,14.92 35.09,13.01 | C33.2 31.66,7.3 31.66,7.17 31.92,6.91 32.55,6.91 32.93,7.3 C25.2 33.06,7.3 33.06,7.17 33.32,6.91 33.7,6.91 33.95,7.17 33.95,8.18 32.81,9.33 IC9.C3 32.68,9.33 32.43,9.33 IC9.C2 32.3,9.33 31.92,9.33 | 31.92,9.33 31.92,9.58 IC9.B1 31.92,9.71 31.79,9.71 31.54,9.96 31.54,10.47 31.79,10.72 C23.1 31.92,10.85 31.92,11.87 C24.1 | 31.92,9.33 IC9.C1 | 29,11.87 31.79,11.87 C24.1 | 33.95,12.76 33.7,12.5 32.3,12.5 31.79,11.99 C24.1 | 33.95,12.76 34.08,12.88 34.08,13.65 33.19,14.53 32.17,14.53 C3.2 | 35.09,13.01 34.84,12.76 33.95,12.76 | 29,11.87 27.47,10.34 26.84,10.34 C38.2 | 35.09,13.01 40.3,13.01 | R1_USB.2 26.46,26.47 26.46,25.58 D1.2 | R1_USB.2 26.33,26.6 23.41,26.6 R2_USB.2 23.28,26.6 23.03,26.6 22.01,27.62 22.01,28 J4.A12_B1 21.89,28.12 21.5,28.5 20.87,28.5 J4.SH4 20.87,28.63 20.87,29.27 | 20.87,29.27 20.87,32.7 J4.SH2 | 30.78,24.82 30.78,27.23 29.51,28.5 J4.SH3 | 30.78,24.82 30.78,24.44 C12.2 | 30.78,24.82 37.13,24.82 37.25,24.69 37.25,24.44 C1-EP-DR.2 | J4.SH3 29.38,28.5 29,28.12 28.36,28.12 J4.A1_B12 28.24,28 28.24,27.49 27.35,26.6 26.46,26.6 R1_USB.2 | J4.SH1 29.51,32.7 29.51,28.63 J4.SH3 | C30.1 14.65,4.76 13.5,4.76 SW_UP.1 13.38,4.76 11.09,2.47 11.09,2.34 10.96,2.22 8.55,2.22 5.12,5.64 3.72,5.64 | R3.1 3.85,2.85 3.85,5.14 C19.2 3.72,5.26 3.72,5.64 | C27.1 0.68,9.33 1.82,9.33 U3.1 1.95,9.33 2.2,9.33 2.84,8.69 U3.9
  Top 0.127: 2.2,7.93 1.95,7.93 U3.4 2.2,7.93 | 2.2,7.93 2.84,8.57 U3.9 | U3.9 2.96,8.57 3.09,8.44 3.72,8.44 U3.6 3.85,8.44 6.14,8.44 8.55,10.85 J1.MP2 8.68,10.98 8.68,16.19 | 3.72,5.64 3.72,6.41 2.2,7.93 | J2.3 7.41,29.14 8.55,29.14 J2.5 8.68,29.01 8.68,28.76 9.82,27.62 12.87,27.62 13.25,27.23 | 13.76,27.74 14.77,28.76 14.9,28.76 15.28,29.14 C16.2 | 13.76,27.74 13.25,27.23 | J1.MP1 8.68,24.06 10.33,24.06 13.12,26.85 13.12,27.11 C15.2 13.25,27.23 | TP_BAT_GND.TP 11.85,32.82 15.15,29.52 15.15,29.27 C16.2 | 13.5,21.27 13.25,21.52 EPD_C2.1 | 13.5,21.27 13.63,21.14 14.27,21.14 14.65,21.52 IC1.B1 | 13,20.76 12.49,20.76 12.23,21.01 12.23,21.14 EPD_C1.1 | 13.5,21.27 13,20.76 | 13,20.76 13,19.74 | 13,19.74 13,19.61 | 13,19.61 13,17.71 | 13,17.71 13,17.33 EPD_C5.1 | 13,19.74 11.34,19.74 J1.8 | 13,19.61 15.41,19.61 15.66,19.87 15.66,20 C34.2 15.79,20.12 16.17,20.5 16.17,21.01 15.79,21.39 IC1.B3 15.79,21.52 16.17,21.9 16.17,22.03 15.79,22.41 C32.2 15.79,23.17 16.17,23.55 16.17,25.08 C10.2 16.3,25.2 13.76,27.74 | 14.27,10.85 14.39,10.85 EPD_C12.1 | 14.27,10.85 13.5,10.85 12.61,11.74 12.61,11.99 EPD_C11.1 | 14.27,10.85 14.77,11.36 14.9,11.36 15.66,12.12 EPD_C10.1 15.79,12.12 15.79,11.99 16.17,11.61 | 19.85,13.65 19.6,13.9 18.71,13.9 C13.2 18.58,13.9 18.58,13.77 18.33,13.52 16.68,13.52 | 19.85,13.65 20.36,13.65 20.74,14.03 C20.2 | 19.85,13.65 19.6,13.39 19.6,11.99 19.73,11.87 20.36,11.87 20.49,11.99 20.49,12.25 C21.2 | 14.9,13.14 15.28,13.14 15.92,13.77 | 14.9,13.14 14.14,13.14 14.01,13.26 14.01,13.52 EPD_C9.1 | 15.92,13.77 16.04,13.9 EPD_C8.1 15.92,13.77 | 14.9,13.14 14.9,15.17 EPD_C7.1 14.77,15.3 14.27,15.3 13.63,15.93
  Top 0.127: 8.68,16.19 9.95,16.19 10.84,15.3 11.22,15.3 J1.17 11.34,15.3 11.73,15.3 11.85,15.42 12.74,15.42 EPD_C6.1 12.74,15.55 13.12,15.93 13.63,15.93 | 8.68,16.19 8.55,16.19 C14.2 | 16.68,13.52 16.17,13.52 15.92,13.77 | 16.17,11.61 16.42,11.61 16.68,11.87 16.68,13.52 | 16.17,11.61 16.17,8.44 | 13,17.71 13.76,17.71 13.88,17.58 13.88,16.19 13.63,15.93 | 20.87,29.27 15.28,29.27 C16.2 | 16.17,8.44 TP_GND.TP
  Bottom 0.127: v22.01,17.84 23.92,17.84 U1.P$79
GND1
  Top 0.127: R_TYPE_SEL.2 43.35,9.84 42.21,9.84 R1_EP_DR.1 42.08,9.96 40.43,9.96 SJ1.2
GND2
  Top 0.127: C29.2 38.27,4.76 38.27,5.64 R7.1 38.14,5.77 33.32,5.77 32.68,5.14 32.68,4.88 SW_DN.2
GND3
  Top 0.127: C31.2 26.71,4.76 26.71,5.52 R8.1 26.58,5.64 23.92,5.64 23.79,5.77 22.27,5.77 21.63,5.14 21.63,4.88 SW_ENT.2
GND4
  Top 0.127: C30.2 15.15,4.76 15.15,5.64 R5.1 15.03,5.77 11.22,5.77 10.58,5.14 10.58,4.88 SW_UP.2
N$1
  Top 0.127: IC2.D1 24.68,8.18 R9.2
N$3
  Top 0.127: IC2.A2 26.2,9.45 26.2,10.22 C38.1
N$7
  Top 0.127: IC2.C2 26.2,8.57 26.46,8.57 26.71,8.31 27.09,8.31 27.47,8.69 C37.1
N$8
  Top 0.127: IC9.A1 31.92,10.09 32.3,10.09 IC9.A2 32.43,10.09 | 32.43,10.09 32.68,10.09 IC9.A3 | C24.2 32.43,11.87 32.43,10.85 C23.2 32.43,10.72 32.43,10.09
N$10
  Top 0.127: IC9.B2 32.43,9.71 32.68,9.71 IC9.B3
N$14
  Top 0.127: IC9.D1 31.92,8.95 31.16,8.95 R4.2
N$16
  Top 0.127: R17.1 38.9,30.79 35.86,30.79 R18.1
N$21
  Top 0.127: IC9.D2 32.43,8.82 32.68,8.82 IC9.D3
N$22
  Top 0.127: C33.1 32.17,7.42 32.3,7.55 32.3,8.44 IC9.E2 32.43,8.44 32.68,8.44 IC9.E3 32.81,8.44 33.44,7.8 33.44,7.42 C25.1
N$23
  Top 0.127: IC9.E1 31.92,8.44 30.14,8.44 R2.2
N$25
  Top 0.127: 4.74,4.37 4.74,4.76 4.36,5.14 C19.1 | 4.74,4.37 4.74,3.99 IC3.10 | 4.74,4.37 5.88,4.37 6.26,3.99 IC3.7
N$31
  Top 0.127: IC3.9 5.38,3.87 5.76,3.87 IC3.8
N$32
  Top 0.127: R3.2 3.85,2.34 4.74,2.34 IC3.1
N$42
  Top 0.127: U1.P$AD14 25.95,14.03 21.89,9.96 20.62,9.96 19.73,9.07 C7.1
N$43
  Top 0.127: U1.P$AD2 23.03,14.03 21.63,14.03 19.98,12.38 C21.1
N$60
  Top 0.127: U1.P$AD23 28.49,14.03 28.49,11.99 C8.1
N$74
  Top 0.127: U1.P$H23 28.49,18.34 28.74,18.34 28.87,18.47 29.12,18.47 31.54,16.06 31.54,14.66 C3.1 31.66,14.53 31.66,14.28 32.55,13.39 33.44,13.39 L1.1
N$75
  Top 0.127: L1.2 34.59,13.39 34.59,14.92 C4.1 34.71,15.04 34.71,16.95 C22.1 34.71,17.07 34.71,21.39 ANT1.1
N$76  (via drill 0.3)
  Top 0.127: U1.P$B5 23.66,20.12 v23.66,20.63 23.66,22.92 22.65,23.93 22.65,25.08 L3.2 | v29.25,19.49 29.25,19.36 29,19.11 U1.P$E24 | 8.3,24.69 7.79,24.19 7.79,23.81 8.04,23.55 14.14,23.55 15.41,24.82 | 8.3,24.69 10.71,27.11 12.61,27.11 C15.1 | 15.41,24.82 15.66,25.08 C10.1 | 8.3,24.69 6.52,26.47 6.52,27.87 6.77,28.12 6.77,30.54 6.52,30.79 6.52,32.95 7.41,33.84 8.55,33.84 13.12,29.27 14.65,29.27 C16.1 | 15.41,24.82 v15.66,24.57
  Bottom 0.127: v29.25,19.49 29,19.49 27.85,20.63 v23.66,20.63 19.6,20.63 v15.66,24.57
N$77  (via drill 0.3)
  Top 0.127: v27.73,20.12 28.11,20.12 28.49,19.74 28.49,19.36 U1.P$D23 | v20.62,18.47 20.11,17.96 C11.1
  Bottom 0.127: v27.73,20.12 22.27,20.12 v20.62,18.47
N$78
  Top 0.127: U1.P$B24 29,20 31.41,20 X1.1 31.54,19.87 31.92,19.49 31.92,17.33 C1.1
N$79
  Top 0.127: U1.P$A23 28.49,20.63 29.12,20.63 31.28,22.79 C2.1 31.41,22.79 32.81,21.39 32.81,21.14 X1.3
N$80
  Top 0.127: C2.2 31.41,22.15 31.41,21.14 X1.4 31.54,21.01 32.55,20 32.81,20 X1.2 32.81,19.87 32.55,19.61 32.55,17.33 C1.2
N$81
  Top 0.127: U1.P$A22 27.98,20.63 27.98,22.03 30.27,24.31 C12.1
N$94
  Top 0.127: U1.P$A18 26.97,20.63 26.46,21.14 25.82,21.14 23.03,23.93 23.03,25.58 22.27,26.35 18.08,26.35 16.42,24.69 16.42,19.11 14.77,17.46 14.77,16.95 17.69,14.03 18.08,14.03 C13.1
N$95
  Top 0.127: L2.2 21.63,23.17 21.63,25.08 L3.1
N$96
  Top 0.127: U1.P$B3 23.16,20.12 23.16,20.5 20.62,23.04 L2.1
N$97
  Top 0.127: U1.P$AC5 23.66,14.53 20.87,14.53 20.74,14.66 20.49,14.66 20.23,14.41 20.23,14.15 C20.1
N$98
  Top 0.127: U1.P$Y2 23.03,15.42 22.65,15.42 22.52,15.55 U1.P$W1 22.52,15.68 16.55,15.68 15.15,17.07 C6.1
N$110  (via drill 0.3)
  Top 0.127: v20.87,20.12 22.52,20.12 U1.P$B1 | v8.42,16.95 8.04,16.57 8.04,16.31 C14.1
  Bottom 0.127: v20.87,20.12 20.62,20.12 20.49,20.25 11.73,20.25 v8.42,16.95
N$111  (via drill 0.3)
  Top 0.127: v20.36,19.74 20.49,19.61 22.52,19.61 U1.P$C1 | v21.12,9.45 21.63,8.95 C5.1
  Bottom 0.127: v20.36,19.74 20.36,18.85 20.11,18.6 20.11,10.47 v21.12,9.45
N$112
  Top 0.127: U1.P$D2 23.03,19.36 22.77,19.36 22.65,19.23 20.11,19.23 18.71,20.63 X2.1 18.71,20.76 18.84,20.88 18.84,25.84 C17.2
N$114
  Top 0.127: U1.P$F2 23.03,18.85 22.65,18.85 22.52,18.98 19.47,18.98 18.71,18.22 X2.2 18.58,18.09 18.58,16.69 C18.2
N$118
  Top 0.127: C1-EP-DR.1 36.87,24.31 36.87,24.19 37.13,23.93 41.57,23.93 41.95,24.31 L5.2
N$119
  Top 0.127: 41.7,19.49 41.95,19.74 L5.1 41.7,19.49 | 41.7,19.49 40.81,18.6 37.25,18.6 C2-EP-DR.2 | Q3.3 44.36,11.74 44.36,16.95 D5.2 44.24,16.95 41.7,19.49
N$120
  Top 0.127: C2-EP-DR.1 36.74,18.47 36.74,15.68 D3.1 36.74,15.55 36.74,13.77 D4.2
N$123
  Top 0.127: R2_EP_DR.2 40.94,12.38 42.08,12.38 Q3.1
N$124
  Top 0.127: R1_EP_DR.2 42.21,9.33 42.71,9.33 43.09,8.95 43.6,8.95 44.11,9.45 44.11,10.09 43.22,10.98 42.21,10.98 Q3.2
N$125
  Top 0.127: R_PWR_EPD.1 40.81,28.25 40.81,29.77 DMG2305UX-7.1
N$132
  Top 0.127: IC1.A2 15.28,22.03 15.28,23.04 C32.1
N$134
  Top 0.127: IC1.C2 15.28,20.88 15.28,20.12 C34.1
N$136
  Top 0.127: 20.36,6.28 15.15,6.28 R5.2 | 20.36,6.28 26.58,6.28 R8.2 | 20.36,6.28 20.36,2.47 20.62,2.22 25.44,2.22 29.38,6.15 38.14,6.15 R7.2
N$141
  Top 0.127: C27.2 0.68,8.95 1.82,8.95 U3.2 1.95,8.82 1.95,8.44 U3.3
N$150
  Top 0.127: EPD_C12.2 14.9,10.72 14.9,10.6 14.65,10.34 12.61,10.34 11.34,11.61 J1.24
N$151
  Top 0.127: EPD_C2.2 13.76,21.65 13.76,21.9 13.63,22.03 11.85,22.03 11.6,21.77 11.34,21.77 J1.4
N$152
  Top 0.127: EPD_C1.2 12.61,21.27 12.61,21.39 12.36,21.65 11.98,21.65 11.6,21.27 11.34,21.27 J1.5
N$153
  Top 0.127: EPD_C5.2 13.5,17.2 13.5,17.07 12.74,16.31 11.34,16.31 J1.15 11.22,16.19 11.22,15.8 J1.16
N$154
  Top 0.127: EPD_C11.2 13,12.12 13,12.25 12.74,12.5 11.85,12.5 11.6,12.25 11.34,12.25 J1.23
N$155
  Top 0.127: EPD_C10.2 16.17,12.25 16.17,12.38 15.79,12.76 11.34,12.76 J1.22
N$156
  Top 0.127: EPD_C9.2 14.39,13.65 14.39,13.77 14.14,14.03 12.61,14.03 11.85,13.26 11.34,13.26 J1.21
N$157  (via drill 0.3)
  Top 0.127: v15.41,14.41 16.3,14.41 16.55,14.15 16.55,14.03 EPD_C8.2 | v11.98,14.03 11.73,13.77 11.34,13.77 J1.20
  Bottom 0.127: v15.41,14.41 12.36,14.41 v11.98,14.03
N$158  (via drill 0.3)
  Top 0.127: v15.03,15.8 15.28,15.55 15.28,15.3 EPD_C7.2 | v13.5,14.92 13.25,14.92 12.87,14.53 11.85,14.53 11.6,14.28 11.34,14.28 J1.19
  Bottom 0.127: v15.03,15.8 14.39,15.8 v13.5,14.92
N$159
  Top 0.127: EPD_C6.2 13.25,15.42 13.25,15.3 12.74,14.79 11.34,14.79 J1.18
N$162
  Top 0.127: J4.A9_B4 22.77,28.12 22.77,28.5 23.16,28.89 27.09,28.89 27.47,28.5 27.47,28.12 J4.A4_B9
N$165
  Top 0.127: R2_USB.1 23.41,27.11 23.41,28 J4.B5
N$166
  Top 0.127: R1_USB.1 26.46,27.11 26.46,28 J4.A5
N$172
  Top 0.127: C42.2 25.95,21.52 26.84,21.52 C43.1
N$173
  Top 0.127: C42.1 25.95,21.9 26.84,21.9 C43.2